# Allegro board CC1310LAUNCHPAD2.brd
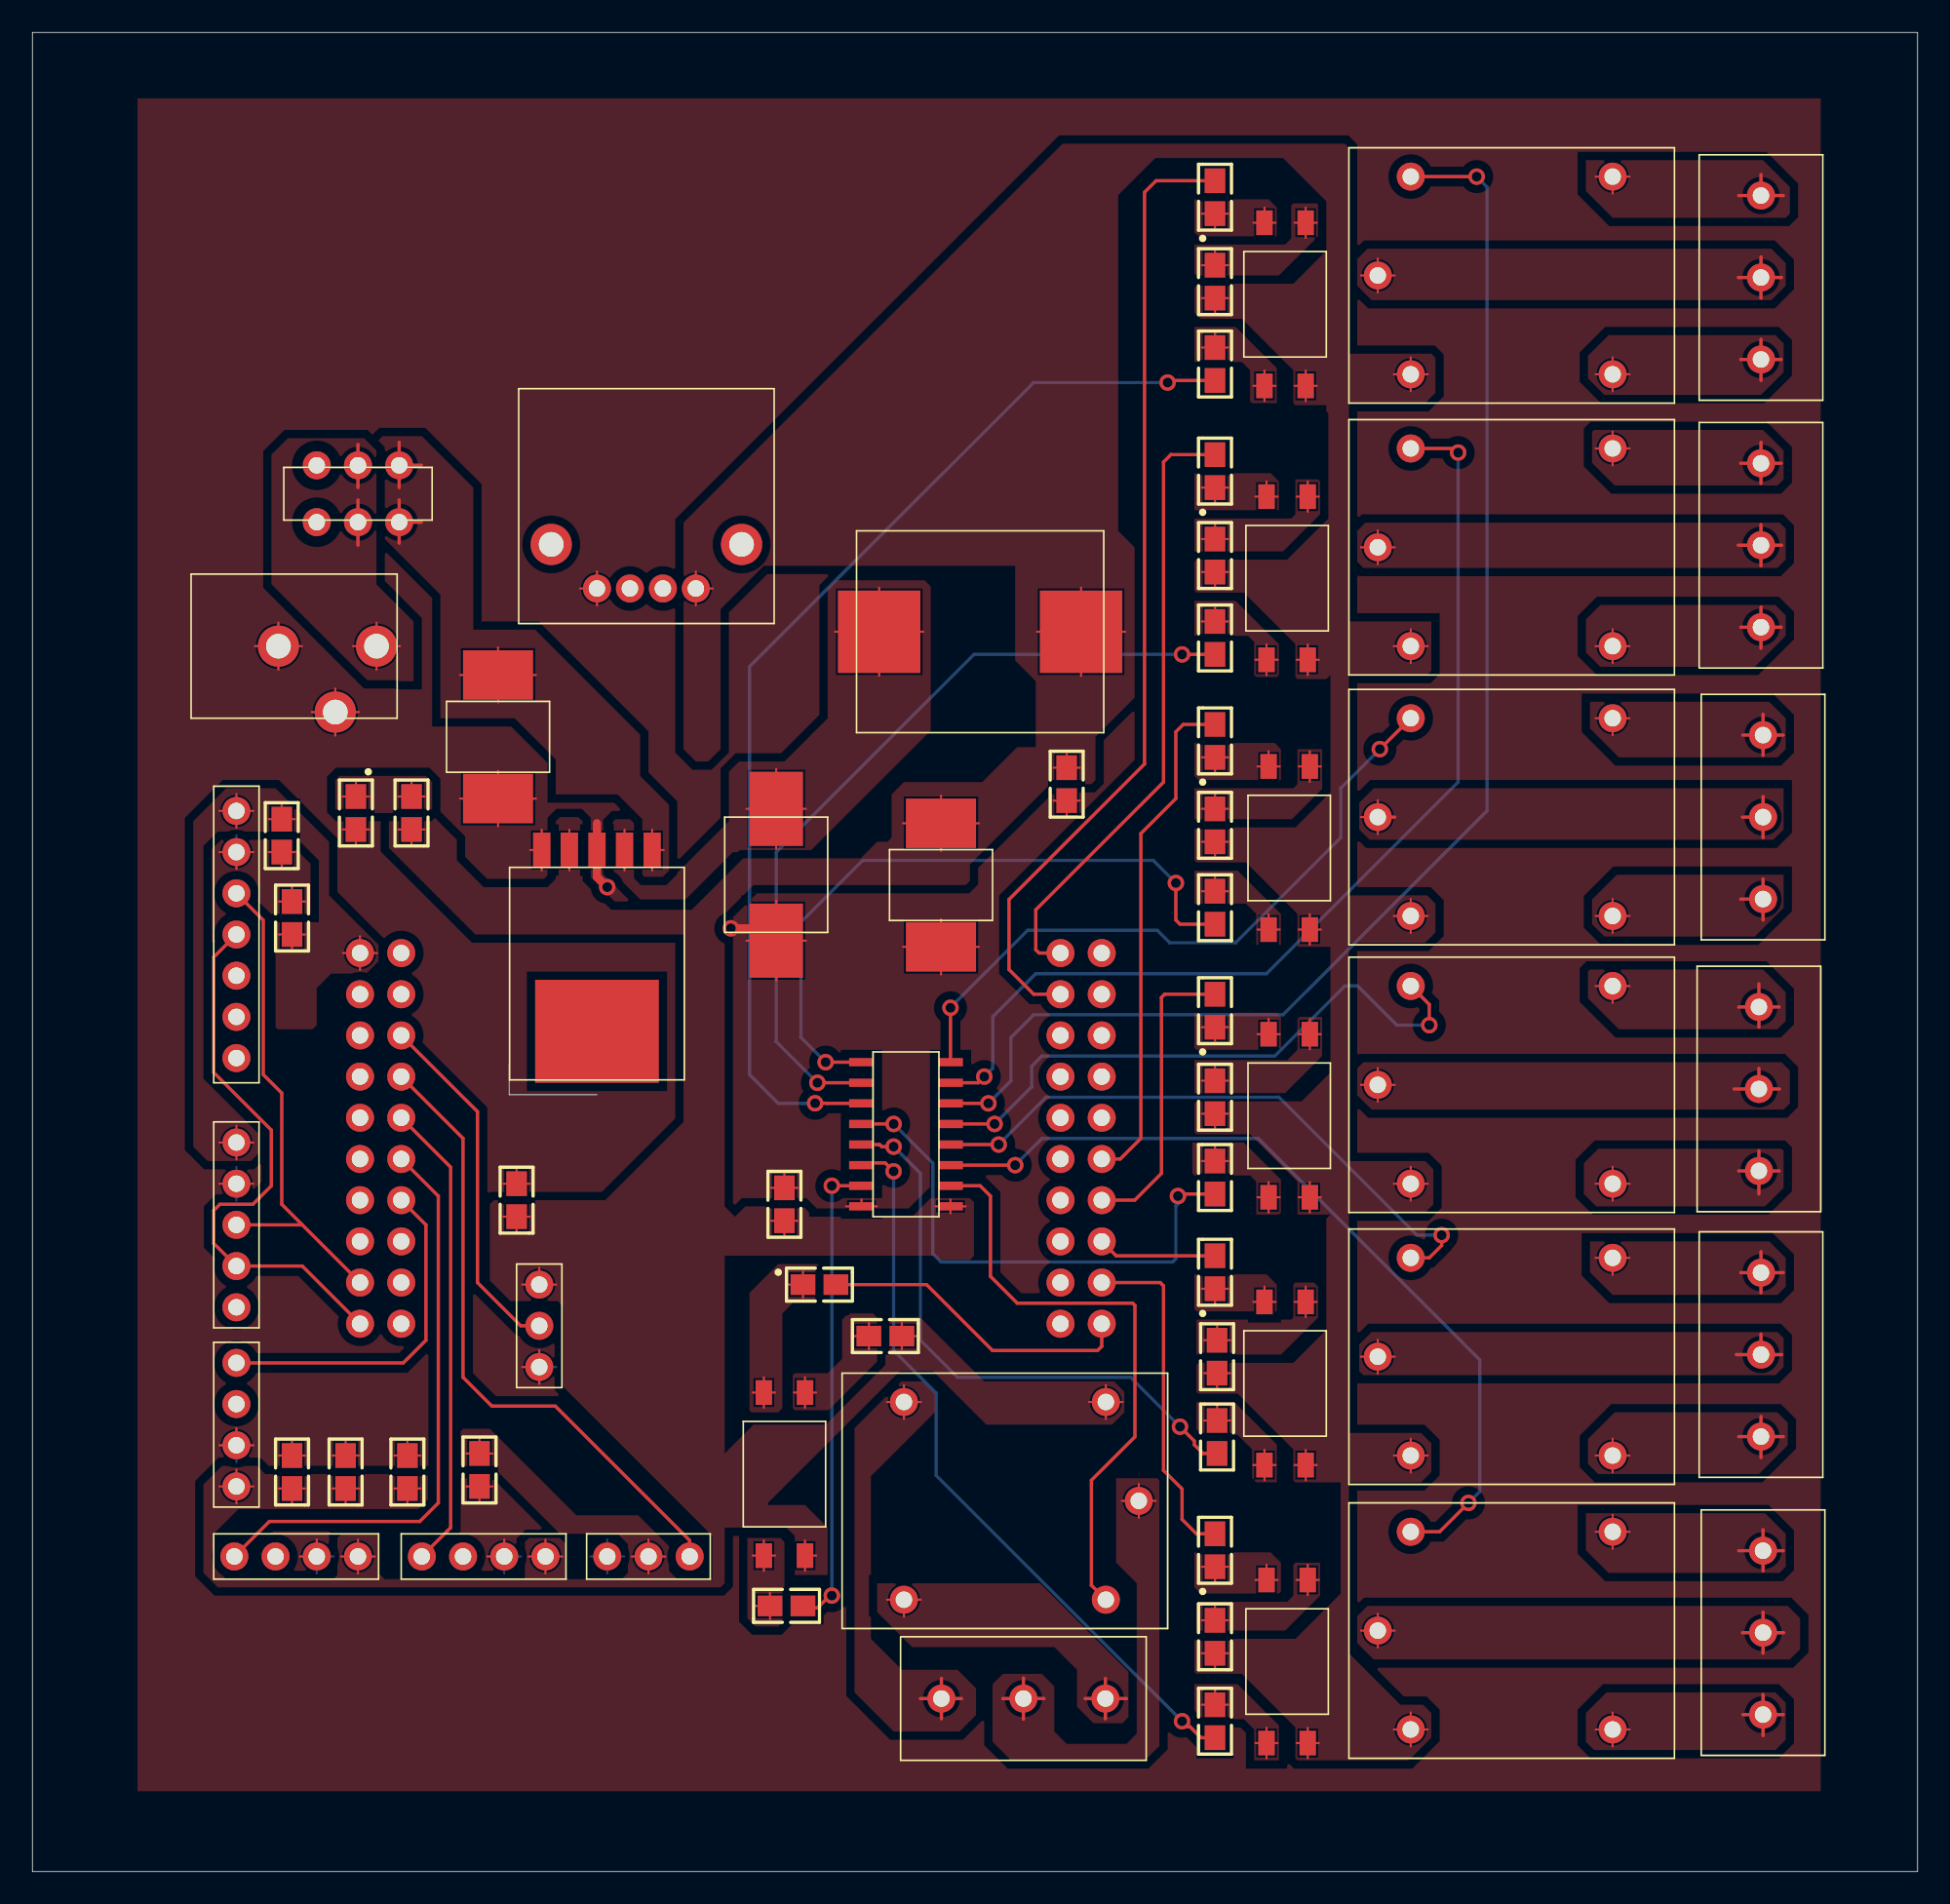
[diagram p0: board, top side]
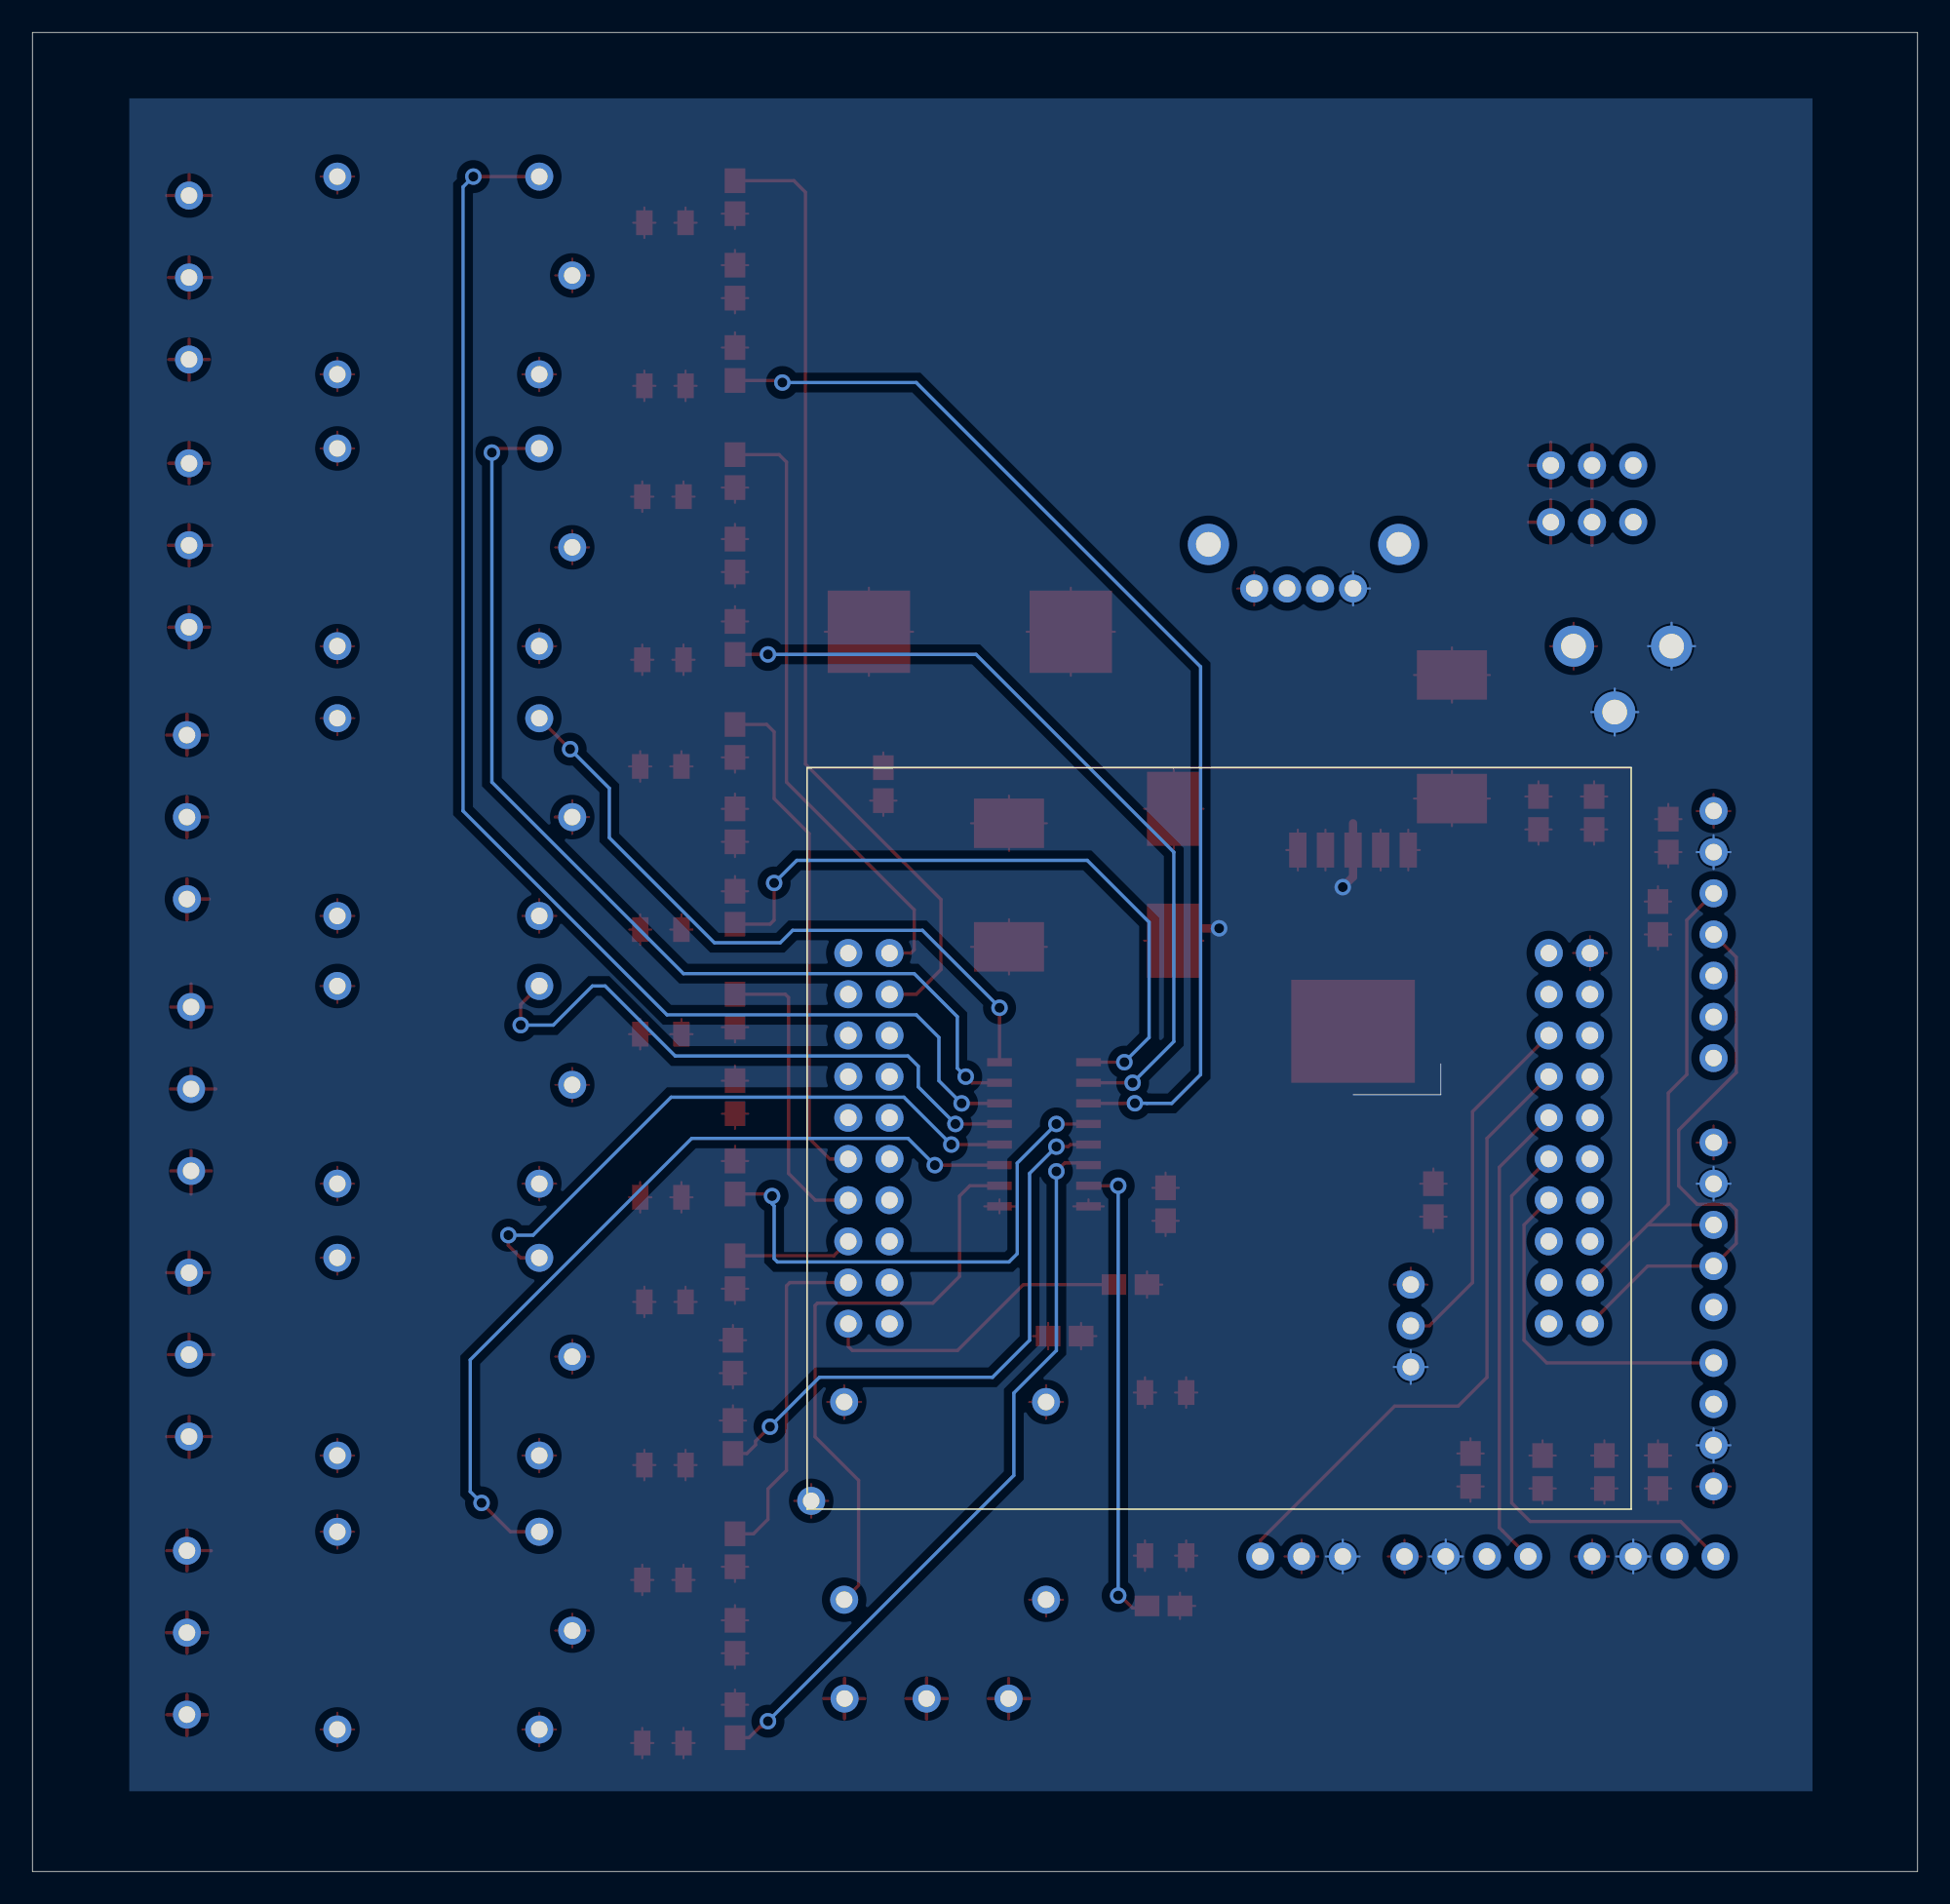
[diagram p1: board, bottom side, seen from below]

Outline 116.21 x 113.41 mm; copper layers: TOP, BOTTOM. Coordinates in mm from the lower left corner of the outline.
Outline path: 0,113.41 0,0 116.21,0 116.21,113.41 0,113.41

## Placement (name value [footprint] x y rotation side)
C1  0.1uF  [C0805]  27.56 24.77 180 top
C2  0.1uF  [C0805]  15.37 63.88 180 top
C3  10uF  [C0805]  63.75 67.06 0 top
C4  0.1uF  [C0805]  16 58.8 180 top
C5  0.1uF  [C0805]  16 24.64 180 top
C6  0.1uF  [C0805]  46.36 41.15 0 top
C8  100uF  [C2312]  28.7 69.98 270 top
C9  100uF  [C2312]  56.01 60.83 270 top
C10  0.1uF  [C0805]  19.3 24.64 180 top
C11  0.1uF  [C0805]  29.85 41.4 180 top
C12  0.1uF  [C0805]  23.11 24.64 180 top
D1  LED  [D0805]  72.9 69.72 0 top
D5  LED  [D0805]  19.94 65.28 180 top
D6  MBR360  [SS34]  45.85 61.47 90 top
D11  LED  [D0805]  72.9 53.09 0 top
D12  LED  [D0805]  72.9 36.96 0 top
D13  LED  [D0805]  72.9 19.81 0 top
D14  LED  [D0805]  48.51 36.2 270 top
D15  LED  [D0805]  72.9 86.36 0 top
D16  LED  [D0805]  72.9 103.25 0 top
J4  HEADER 3  [KF3013P]  106.68 65.02 0 top
J5  HEADER 3  [KF3013P]  106.55 81.79 0 top
J6  HEADER 3  [KF3013P]  106.55 98.3 0 top
J7  HEADER 3  [KF3013P]  106.43 48.26 0 top
J8  HEADER 3  [KF3013P]  106.55 31.88 0 top
J10  HEADER 3  [KF3013P]  61.09 10.67 270 top
J11  HEADER 3  [KF3013P]  106.68 14.73 0 top
L1  47uH  [RH127]  58.42 76.45 0 top
LS1  RELAY SPDT  [HK33F]  91.19 65.02 180 top
LS2  RELAY SPDT  [HK33F]  91.19 81.66 180 top
LS3  RELAY SPDT  [HK33F]  91.19 98.43 180 top
LS4  RELAY SPDT  [HK33F]  91.19 31.75 180 top
LS5  RELAY SPDT  [HK33F]  91.19 48.51 180 top
LS6  RELAY SPDT  [HK33F]  59.94 22.86 0 top
LS7  RELAY SPDT  [HK33F]  91.19 14.86 180 top
R5  220 Ohm  [R0805]  23.37 65.28 180 top
R12  1k Ohm  [R0805]  72.9 64.52 180 top
R13  1k Ohm  [R0805]  72.9 47.75 180 top
R14  1k Ohm  [R0805]  73.03 31.75 180 top
R15  1k Ohm  [R0805]  72.9 14.48 180 top
R16  1k Ohm  [R0805]  52.58 33.02 270 top
R17  1k Ohm  [R0805]  72.9 81.15 180 top
R18  1k Ohm  [R0805]  72.9 98.04 180 top
R20  1k Ohm  [R0805]  72.9 59.44 0 top
R21  1k Ohm  [R0805]  72.9 42.8 0 top
R22  1k Ohm  [R0805]  73.03 26.8 0 top
R23  1k Ohm  [R0805]  72.9 9.27 0 top
R24  1k Ohm  [R0805]  46.48 16.38 90 top
R25  1k Ohm  [R0805]  72.9 76.07 0 top
R26  1k Ohm  [R0805]  72.9 92.96 0 top
U7  -  [ULN2003A]  53.85 45.47 0 top
U9  bh1750  [BH1750]  12.57 39.88 0 top
U10  -  [LM393]  12.57 27.56 180 top
U11  pH  [PH]  37.97 19.43 90 top
U12  CC1310LauchPad  [CC1310CONNECTOR]  43.05 45.21 180 bottom
U13  LM2576HV-ADJ  [LM2576]  34.8 55.37 90 top
U14  -  [LM393]  16.26 19.43 270 top
U15  -  [LM35]  31.24 33.66 0 top
U16  -  [LM393]  27.81 19.43 270 top
U17  DC  [DC002POWER]  16.13 75.56 0 top
U18  USB  [USBFEMALE]  37.85 84.2 90 top
U21  PC817XxNiP0F  [PC817X2NIP0F]  77.47 63.12 270 top
U22  PC817XxNiP0F  [PC817X2NIP0F]  77.47 46.61 270 top
U23  PC817XxNiP0F  [PC817X2NIP0F]  77.22 30.1 270 top
U24  PC817XxNiP0F  [PC817X2NIP0F]  77.34 12.95 270 top
U25  PC817XxNiP0F  [PC817X2NIP0F]  46.36 24.51 270 top
U26  PC817XxNiP0F  [PC817X2NIP0F]  77.34 79.76 270 top
U27  PC817XxNiP0F  [PC817X2NIP0F]  77.22 96.65 270 top
U28  -  [MSS-22D18]  20.07 84.96 90 top
U29  -  [HDC100X]  12.57 57.78 0 top

## Library data of the parts
C1-C6 C10-C12 = CAP NP
C8 C9 = CAP POL
D1 D5 D11-D16 = LED
D6 = DIODE SCHOTTKY
J4-J8 J10 J11 = HEADER 3
L1 = INDUCTOR
LS1-LS7 = RELAY SPDT
R5 R12-R18 R20-R26 = RESISTOR
U7 = ULN2003A
U9 = bh1750
U10 U14 U16 = LM393
U11 = pH
U12 = CC1310LaouchPad
U13 = LM2576HV-ADJ
U15 = LM35
U17 = DC002
U18 = USB
U21-U27 = PC817XxNiP0F
U28 = MSS-22D18
U29 = HDC100X

## Footprints (pads in the part's own frame, mm; a bottom-side part is the same pattern mirrored in y, then rotated)
BH1750
  round 1.727 hole 1.016: 1(0,5.08) 2(0,2.54) 3(0,0) 4(0,-2.54) 5(0,-5.08)
C0805
  rect 1.27x1.524 smd: 1(0,1.016) 2(0,-1.016)
C2312
  rect 3.048x4.318 smd: 1(-3.81,0) 2(3.81,0)
CC1310CONNECTOR
  round 1.727 hole 1.016: 1(22.86,11.43) 2(22.86,8.89) 3(22.86,6.35) 4(22.86,3.81) 5(22.86,1.27) 6(22.86,-1.27) 7(22.86,-3.81) 8(22.86,-6.35) 9(22.86,-8.89) 10(22.86,-11.43) 11(-22.86,-11.43) 12(-22.86,-8.89) 13(-22.86,-6.35) 14(-22.86,-3.81) 15(-22.86,-1.27) 16(-22.86,1.27) 17(-22.86,3.81) 18(-22.86,6.35) 19(-22.86,8.89) 20(-22.86,11.43) 21(20.32,11.43) 22(20.32,8.89) 23(20.32,6.35) 24(20.32,3.81) 25(20.32,1.27) 26(20.32,-1.27) 27(20.32,-3.81) 28(20.32,-6.35) 29(20.32,-8.89) 30(20.32,-11.43) 31(-20.32,-11.43) 32(-20.32,-8.89) 33(-20.32,-6.35) 34(-20.32,-3.81) 35(-20.32,-1.27) 36(-20.32,1.27) 37(-20.32,3.81) 38(-20.32,6.35) 39(-20.32,8.89) 40(-20.32,11.43)
D0805
  rect 1.27x1.524 smd: 1(0,1.016) 2(0,-1.016)
DC002POWER
  round 2.54 hole 1.524: 3(-0.965,0) 4(5.08,0) 5(2.54,-4.064)
HDC100X
  round 1.727 hole 1.016: 1(0,-7.62) 2(0,-5.08) 3(0,-2.54) 4(0,0) 5(0,2.54) 6(0,5.08) 7(0,7.62)
HK33F
  round 1.727 hole 1.016: 1(6.223,6.096) 2(6.223,-6.096) 3(8.255,0) 4(-6.223,6.096) 5(-6.223,-6.096)
KF3013P
  round 1.727 hole 1.016: 1(0,5.055) 2(0,0) 3(0,-5.055)
LM35
  round 1.727 hole 1.016: 1(0,2.54) 2(0,0) 3(0,-2.54)
LM393
  round 1.727 hole 1.016: 1(0,3.81) 2(0,1.27) 3(0,-1.27) 4(0,-3.81)
LM2576
  rect 6.35x7.62 smd: (-3.556,0)
  rect 2.159x1.067 smd: 1(7.62,-3.404) 2(7.62,-1.702) 3(7.62,0) 4(7.62,1.702) 5(7.62,3.404)
MSS-22D18
  round 1.727 hole 1.016: 1(-1.753,2.54) 2(-1.753,0) 3(-1.753,-2.54) 4(1.753,-2.54) 5(1.753,0) 6(1.753,2.54)
PC817X2NIP0F
  rect 1.524x1.016 smd: 1(-5.029,1.27) 2(-5.029,-1.27) 3(5.029,-1.27) 4(5.029,1.27)
PH
  round 1.727 hole 1.016: 1(0,2.54) 2(0,0) 3(0,-2.54)
R0805
  rect 1.27x1.524 smd: 1(0,1.016) 2(0,-1.016)
RH127
  rect 5.08x5.08 smd: 1(-6.223,0) 2(6.223,0)
SS34
  rect 4.572x3.302 smd: 1(-4.064,0) 2(4.064,0)
ULN2003A
  rect 1.524x0.508 smd: 1(-2.743,4.445) 2(-2.743,3.175) 3(-2.743,1.905) 4(-2.743,0.635) 5(-2.743,-0.635) 6(-2.743,-1.905) 7(-2.743,-3.175) 8(-2.743,-4.445) 9(2.743,-4.445) 10(2.743,-3.175) 11(2.743,-1.905) 12(2.743,-0.635) 13(2.743,0.635) 14(2.743,1.905) 15(2.743,3.175) 16(2.743,4.445)
USBFEMALE
  round 2.54 hole 1.524: (-2.362,5.867) (-2.362,-5.867)
  round 1.727 hole 1.016: 1(-5.08,-3.048) 2(-5.08,-1.016) 3(-5.08,1.016) 4(-5.08,3.048)

## Nets
3V3: C2.2 C4.1 U9.1(VCC) U12.1(3V3) U29.7(VIN)
5V: C1.2 C3.1 C5.1 C6.2 C9.1 C10.1 C11.1 C12.1 L1.2 LS1.1(COIL1) LS2.1(COIL1) LS3.1(COIL1) LS4.1(COIL1) LS5.1(COIL1) LS6.1(COIL1) LS7.1(COIL1) R5.1 R12.1 R13.1 R14.1 R15.1 R16.1 R17.1 R18.1 U7.9(COM) U10.1(VCC) U11.2(VCC) U13.4(FEEDBACK) U14.1(VCC) U15.1(VCC) U16.1(VCC) U18.1(VCC) U21.4(EMITTER) U22.4(EMITTER) U23.4(EMITTER) U24.4(EMITTER) U25.4(EMITTER) U26.4(EMITTER) U27.4(EMITTER)
GND: C1.1 C2.1 C3.2 C4.2 C5.2 C6.1 C8.2 C9.2 C10.2 C11.2 C12.2 D5.1(CATHODE) D6.1(ANODE) U7.8(E) U9.2(GND) U10.2(GND) U11.1(GND) U13.3(GND) U13.5(ON/OFF) U14.2(GND) U15.3(GND) U16.2(GND) U17.3(GND1) U17.5(GND2) U18.4(GND) U29.6(GND)
A: U12.21(5V)
N45592: C8.1 U13.1(VIN) U28.3(C1) U28.4(C2)
N45672: D6.2(CATHODE) L1.1 U13.2(OUTPUT)
N45788: U9.3(SCL) U12.9(DIO4 / I2C SCL) U29.5(SCL)
N45822: U9.4(SDA) U12.10(DIO5 / I2C SDA) U29.4(SDA)
N45888: U12.25(DIO27 / A4) U16.4(AO)
N45956: LS2.2(COIL2) U7.15(2C)
N45960: LS3.2(COIL2) U7.14(3C)
N46040: LS7.2(COIL2) U7.11(6C)
N46052: LS6.2(COIL2) U7.10(7C)
N46056: J11.2 LS7.3(COMMON)
N46086: J11.1 LS7.5(NC)
N46098: J11.3 LS7.4(NO)
N46172: LS4.2(COIL2) U7.12(5C)
N46276: LS5.2(COIL2) U7.13(4C)
N47108: U12.23(DIO25 / A2) U15.2(OUT)
N47294: J4.2 LS1.3(COMMON)
N47328: J4.1 LS1.5(NC)
N47344: J4.3 LS1.4(NO)
N47364: J5.2 LS2.3(COMMON)
N47376: J5.1 LS2.5(NC)
N47410: J5.3 LS2.4(NO)
N47434: J6.2 LS3.3(COMMON)
N47472: J6.1 LS3.5(NC)
N47484: J6.3 LS3.4(NO)
N47508: J7.2 LS5.3(COMMON)
N47520: J7.1 LS5.5(NC)
N47550: J7.3 LS5.4(NO)
N47574: J8.2 LS4.3(COMMON)
N47604: J8.1 LS4.5(NC)
N47616: J8.3 LS4.4(NO)
N47728: J10.2 LS6.3(COMMON)
N47740: J10.1 LS6.5(NC)
N47770: J10.3 LS6.4(NO)
N59569: U12.26(DIO28 / A5) U14.4(AO)
N60071: U11.3(AO) U12.24(DIO26 / A3)
N63732: U10.4(AO) U12.27(DIO29 / A6)
N64930: LS1.2(COIL2) U7.16(1C)
N72485: R12.2 U21.1(ANODE)
N72769: R13.2 U22.1(ANODE)
N73065: R14.2 U23.1(ANODE)
N73365: R15.2 U24.1(ANODE)
N73669: R16.2 U25.1(ANODE)
N74807: D1.1(CATHODE) U12.15(DIO9 / MOSI)
N74854: D11.1(CATHODE) U12.14(DIO8 / MISO)
N74907: D12.1(CATHODE) U12.13(DIO13 / BTN1)
N74952: D13.1(CATHODE) U12.12(DIO14 / BTN2)
N74990: D14.2(ANODE) U25.2(CATHODE)
N74994: D14.1(CATHODE) U12.11(DIO15)
N75036: D15.1(CATHODE) U12.40(DIO7 / GRN LED)
N75078: D16.1(CATHODE) U12.39(DIO8 / RED LED)
N76545: R20.1 U21.3(COLLECTOR)
N76560: R21.1 U22.3(COLLECTOR)
N76587: R22.1 U23.3(COLLECTOR)
N76621: R23.1 U24.3(COLLECTOR)
N76655: R24.1 U25.3(COLLECTOR)
N87792: D1.2(ANODE) U21.2(CATHODE)
N88579: D11.2(ANODE) U22.2(CATHODE)
N89000: D12.2(ANODE) U23.2(CATHODE)
N89401: D13.2(ANODE) U24.2(CATHODE)
N90793: R17.2 U26.1(ANODE)
N91085: D15.2(ANODE) U26.2(CATHODE)
N91216: R25.1 U26.3(COLLECTOR)
N91679: R18.2 U27.1(ANODE)
N91683: D16.2(ANODE) U27.2(CATHODE)
N91836: R26.1 U27.3(COLLECTOR)
N91946: R26.2 U7.3(3B)
N91982: R20.2 U7.1(1B)
N92026: R21.2 U7.4(4B)
N92057: R25.2 U7.2(2B)
N93563: R23.2 U7.6(6B)
N93742: R24.2 U7.7(7B)
N95463: U17.4(VCC) U28.2(B1) U28.5(B2)
N101467: R22.2 U7.5(5B)
N478560: D5.2(ANODE) R5.2

Pads without a net: U9 5; U10 3; U12 2 3 4 5 6 7 8 16 17 18 19 20 22 28 29 30 31 32 33 34 35 36 37 38; U14 3; U16 3; U18 2 3; U28 1 6; U29 1 2 3

## Via types
v1: diameter 1.016, hole 0.61, TOP to BOTTOM, 30 vias

## Routing (per net, layer and track width the routed paths; a pad name or vN(x,y) marks a point on that pad's centre or on a via; arc(x,y) is an arc through that point)
3V3: length 17.6
  TOP w0.127: U12.1 21.23,56.64 ; U12.1 20.19,55.6 ; U12.1 20.19,57.68 ; U12.1 19.15,56.64 ; U29.7 13.61,65.41 ; U29.7 12.57,66.45 ; U29.7 12.57,64.36 ; U29.7 11.53,65.41 ; 14.55,64.9 C2.2 ; C2.2 15.37,65.84 ; C2.2 16.18,64.9 ; 11.53,44.96 U9.1 ; U9.1 13.61,44.96 ; U9.1 12.57,43.92 ; U9.1 12.57,46 ; 16,56.84 16,57.78 ; 16,57.78 15.19,57.78 ; 16,57.78 16.82,57.78
5V: length 136.9
  TOP w0.127: 29.85,39.45 C11.1 ; C11.1 30.66,40.39 ; C11.1 29.03,40.39 ; 23.11,22.68 C12.1 ; C12.1 22.3,23.62 ; C12.1 23.93,23.62 ; LS4.1 86,25.65 ; LS4.1 84.96,24.61 ; LS4.1 84.96,26.7 ; LS4.1 83.92,25.65 ; 72.9,62.56 R12.1 ; R12.1 72.08,63.5 ; R12.1 73.71,63.5 ; LS2.1 86,75.56 ; LS2.1 83.92,75.56 ; LS2.1 84.96,74.52 ; LS2.1 84.96,76.61 ; 33.1,64.25 U13.4 33.1,61.73 ; 23.37,63.32 R5.1 ; R5.1 22.55,64.26 ; R5.1 24.18,64.26 ; L1.2 67.36,76.45 ; L1.2 64.64,73.74 ; L1.2 64.64,79.17 ; L1.2 61.92,76.45 ; 12.57,22.71 U10.1 ; U10.1 12.57,24.79 ; U10.1 13.61,23.75 ; U10.1 11.53,23.75 ; R18.1 73.71,97.03 ; R18.1 72.08,97.03 ; R18.1 72.9,96.09 ; 78.61,6.98 U24.4 ; U24.4 78.61,8.87 ; U24.4 79.3,7.92 ; U24.4 77.93,7.92 ; 73.03,29.79 R14.1 ; R14.1 73.84,30.73 ; R14.1 72.21,30.73 ; 18.49,23.62 C10.1 ; C10.1 20.12,23.62 ; C10.1 19.3,22.68 ; C5.1 16.82,23.62 ; C5.1 15.19,23.62 ; C5.1 16,22.68 ; 78.74,57.15 U21.4 ; U21.4 78.05,58.09 ; U21.4 78.74,59.03 ; U21.4 79.43,58.09 ; 46.36,39.19 C6.2 ; C6.2 47.17,40.13 ; C6.2 45.54,40.13 ; 84.96,7.72 LS7.1 ; LS7.1 86,8.76 ; LS7.1 84.96,9.8 ; LS7.1 83.92,8.76 ; 72.08,13.46 R15.1 ; R15.1 73.71,13.46 ; R15.1 72.9,12.52 ; 84.96,57.89 LS1.1 ; LS1.1 84.96,59.97 ; LS1.1 83.92,58.93 ; LS1.1 86,58.93 ; 72.08,46.74 R13.1 ; R13.1 72.9,45.8 ; R13.1 73.71,46.74 ; 30.58,19.43 U16.1 ; U16.1 32.66,19.43 ; U16.1 31.62,20.47 ; U16.1 31.62,18.39 ; 26.75,25.78 C1.2 ; C1.2 27.56,26.72 ; C1.2 28.37,25.78 ; 66.17,27.91 LS6.1 ; LS6.1 65.13,28.96 ; LS6.1 66.17,30 ; LS6.1 67.21,28.96 ; 77.8,91.62 U27.4 ; U27.4 79.17,91.62 ; U27.4 78.49,90.68 ; U27.4 78.49,92.56 ; U11.2 39.01,19.43 ; U11.2 37.97,18.39 ; U11.2 37.97,20.47 ; U11.2 36.93,19.43 ; 84.96,41.38 LS5.1 ; LS5.1 86,42.42 ; LS5.1 84.96,43.46 ; LS5.1 83.92,42.42 ; 72.08,80.14 72.9,80.14 ; 72.9,80.14 73.71,80.14 ; 72.9,80.14 72.9,79.2 ; 55.65,41.02 U7.9 ; U7.9 57.53,41.02 ; U7.9 56.59,41.45 ; U7.9 56.59,40.59 ; U22.4 78.74,42.52 ; U22.4 79.43,41.58 ; U22.4 78.05,41.58 ; U22.4 78.74,40.64 ; U18.1 40.89,80.16 ; U18.1 40.89,78.08 ; U18.1 41.94,79.12 ; 19.02,19.43 U14.1 ; U14.1 20.07,20.47 ; U14.1 21.11,19.43 ; U14.1 20.07,18.39 ; 62.94,68.07 C3.1 ; C3.1 64.57,68.07 ; C3.1 63.75,69.01 ; 53.59,33.02 53.59,33.83 ; 53.59,33.02 53.59,32.21 ; 53.59,33.02 54.53,33.02 ; U25.4 47.62,20.42 ; U25.4 47.62,18.54 ; U25.4 48.31,19.48 ; U26.4 78.61,75.67 ; U26.4 79.3,74.73 ; U26.4 77.93,74.73 ; U26.4 78.61,73.79 ; 30.2,36.2 31.24,36.2 ; 31.24,36.2 31.24,37.24 ; 31.24,36.2 32.28,36.2 ; 83.92,92.33 LS3.1 ; LS3.1 84.96,91.29 ; LS3.1 86,92.33 ; LS3.1 84.96,93.37 ; C9.1 56.01,66.35 ; C9.1 53.67,64.64 ; C9.1 56.01,62.94 ; C9.1 58.34,64.64 ; U23.4 78.49,26.01 ; U23.4 77.8,25.07 ; U23.4 78.49,24.13 ; U23.4 79.17,25.07
GND: length 137.5
  TOP w0.127: 26.36,66.17 C8.2 ; C8.2 28.7,67.87 ; C8.2 31.04,66.17 ; C8.2 28.7,64.46 ; U15.3 31.24,32.16 ; U15.3 31.24,30.07 ; U15.3 30.2,31.12 ; D6.1 47.68,57.4 ; D6.1 45.85,54.94 ; D6.1 44.02,57.4 ; D6.1 45.85,59.87 ; 28.04,19.43 U16.2 29.08,20.47 ; D5.1 20.75,64.26 ; D5.1 19.13,64.26 ; D5.1 19.94,63.32 ; C4.2 16,60.76 ; C4.2 16.82,59.82 ; C4.2 15.19,59.82 ; U29.6 13.61,62.87 ; U29.6 12.57,61.82 ; U29.6 11.53,62.87 ; 13.72,75.56 U17.3 ; U17.3 15.16,77.01 ; U17.3 16.61,75.56 ; U17.3 15.16,74.12 ; 15.37,61.92 C2.1 ; C2.1 14.55,62.87 ; C2.1 16.18,62.87 ; C10.2 19.3,26.59 ; C10.2 20.12,25.65 ; C10.2 18.49,25.65 ; 56.01,55.32 C9.2 ; C9.2 53.67,57.02 ; C9.2 58.34,57.02 ; C9.2 56.01,58.73 ; C12.2 23.11,26.59 ; C12.2 22.3,25.65 ; C12.2 23.93,25.65 ; 34.8,78.08 U18.4 ; U18.4 34.8,80.16 ; U18.4 33.76,79.12 ; C1.1 28.37,23.75 ; C1.1 27.56,22.81 ; C1.1 26.75,23.75 ; U10.2 12.57,27.33 ; U10.2 13.61,26.29 ; U10.2 11.53,26.29 ; 15.19,25.65 C5.2 ; C5.2 16.82,25.65 ; C5.2 16,26.59 ; 17.22,71.5 U17.5 ; U17.5 18.67,72.95 ; U17.5 18.67,70.05 ; U17.5 20.12,71.5 ; U7.8 51.1,41.45 ; U7.8 50.16,41.02 ; U7.8 52.05,41.02 ; 31.39,61.73 U13.5 ; U13.5 30.68,62.99 ; U13.5 31.39,64.25 ; 62.94,66.04 C3.2 ; C3.2 63.75,65.1 ; C3.2 64.57,66.04 ; 13.61,42.42 U9.2 11.53,42.42 ; 17.53,20.47 U14.2 16.48,19.43 ; C6.1 46.36,43.1 ; C6.1 45.54,42.16 ; C6.1 47.17,42.16 ; C11.2 29.85,43.36 ; C11.2 29.03,42.42 ; C11.2 30.66,42.42
  TOP w0.508: D6.1 45.09,58.17 v1(43.05,58.17) ; v1(35.43,60.71) 34.8,61.34 U13.3 34.8,64.64
  BOTTOM w0.127: U16.2 29.08,20.47 ; U16.2 30.12,19.43 ; U16.2 28.04,19.43 ; U16.2 29.08,18.39 ; 12.57,41.38 U9.2 ; U9.2 12.57,43.46 ; U9.2 13.61,42.42 ; U9.2 11.53,42.42 ; U17.3 15.16,77.01 ; U17.3 13.72,75.56 ; U17.3 16.61,75.56 ; U17.3 15.16,74.12 ; U29.6 12.57,63.91 ; U29.6 13.61,62.87 ; U29.6 12.57,61.82 ; U29.6 11.53,62.87 ; 17.22,71.5 U17.5 ; U17.5 20.12,71.5 ; U17.5 18.67,70.05 ; U17.5 18.67,72.95 ; U14.2 17.53,20.47 ; U14.2 17.53,18.39 ; U14.2 16.48,19.43 ; U14.2 18.57,19.43 ; 34.39,19.43 U11.1 ; U11.1 35.43,20.47 ; U11.1 35.43,18.39 ; U11.1 36.47,19.43 ; U10.2 13.61,26.29 ; U10.2 11.53,26.29 ; U10.2 12.57,25.25 ; U10.2 12.57,27.33 ; 30.2,31.12 U15.3 ; U15.3 31.24,30.07 ; U15.3 31.24,32.16 ; U15.3 32.28,31.12 ; 34.8,78.08 U18.4 ; U18.4 33.76,79.12 ; U18.4 34.8,80.16
N45592: length 19.5
  TOP w0.127: U13.1 38.2,64.25 ; U13.1 38.91,62.99 ; U13.1 38.2,61.73 ; C8.1 31.04,73.79 ; C8.1 28.7,75.49 ; C8.1 26.36,73.79 ; C8.1 28.7,72.08
  TOP w0.203: 22.61,86.72 22.61,88.14 ; 22.61,86.72 23.98,86.72 ; 22.61,86.72 22.61,85.34 ; 22.61,83.21 22.61,84.58 ; 22.61,83.21 23.98,83.21 ; 22.61,83.21 22.61,81.92
N45672: length 22
  TOP w0.127: L1.1 54.92,76.45 ; L1.1 49.48,76.45 ; L1.1 52.2,73.74 ; L1.1 52.2,79.17 ; D6.2 45.85,68 ; D6.2 45.85,63.07 ; D6.2 44.02,65.53 ; D6.2 47.68,65.53 ; 36.5,61.73 U13.2 36.5,64.25
N45788: length 31.2
  TOP w0.203: U29.5 14.22,58.67 14.22,49.15 15.37,48.01 15.37,41.15 16.64,39.88 ; 16.64,39.88 U12.9 ; 16.64,39.88 U9.3
N45822: length 34.8
  TOP w0.203: U12.10 16.64,37.34 U9.4 11.18,38.74 11.18,40.77 11.56,41.15 13.59,41.15 14.72,42.28 14.72,45.73 11.18,49.27 11.18,56.39 U29.4
N45888: length 29.1
  TOP w0.203: U12.25 25.78,43.43 25.78,21.21 25.58,21.01 U16.4
N45956: length 64.2
  TOP w0.203: U7.15 58.29,48.64 v1(58.67,49.02) ; LS2.2 87.68,87.76 87.88,87.55 v1(87.88,87.5)
  BOTTOM w0.203: v1(87.88,87.5) 87.88,67.18 76.07,55.37 61.85,55.37 59.19,52.72 59.19,49.54 v1(58.67,49.02)
N45960: length 85.5
  TOP w0.203: LS3.2 v1(89.03,104.52) ; U7.14 v1(58.93,47.37)
  BOTTOM w0.203: v1(58.93,47.37) 60.33,48.77 60.33,51.44 61.72,52.83 77.09,52.83 89.66,65.41 89.66,103.89 v1(89.03,104.52)
N46040: length 52.4
  TOP w0.203: U7.11 v1(60.58,43.56) ; LS7.2 86.74,20.96 v1(88.52,22.73)
  BOTTOM w0.203: v1(60.58,43.56) 62.23,45.21 75.56,45.21 89.22,31.56 89.22,23.43 v1(88.52,22.73)
N46052: length 37
  TOP w0.203: U7.10 58.42,42.29 59.06,41.66 59.06,36.7 60.71,35.05 67.82,35.05 67.96,34.91 67.96,26.81 65.28,24.13 65.28,17.65 LS6.2
N46056: length 9.2
  TOP w0.127: 82.93,13.82 LS7.3 ; LS7.3 81.89,14.86 ; LS7.3 82.93,15.9 ; LS7.3 83.97,14.86
  TOP w0.203: J11.2 107.95,14.73 ; J11.2 106.68,16 ; J11.2 105.41,14.73 ; J11.2 106.68,13.46
N46086: length 9.5
  TOP w0.127: LS7.5 98.45,20.96 ; LS7.5 97.41,19.91 ; LS7.5 97.41,22 ; LS7.5 96.37,20.96
  TOP w0.203: J11.1 106.68,18.54 ; J11.1 106.68,21.08 ; J11.1 107.92,19.79 ; J11.1 105.18,19.79
N46098: length 9.2
  TOP w0.127: LS7.4 98.45,8.76 ; LS7.4 96.37,8.76 ; LS7.4 97.41,7.72 ; LS7.4 97.41,9.8
  TOP w0.203: J11.3 106.68,10.92 ; J11.3 107.92,9.68 ; J11.3 106.68,8.38 ; J11.3 105.44,9.68
N46172: length 37.9
  TOP w0.203: v1(86.87,39.24) 86.87,38.61 86.11,37.85 v1(84.96,37.85) ; U7.12 v1(59.56,44.83)
  BOTTOM w0.203: v1(59.56,44.83) 62.48,47.75 76.84,47.75 85.34,39.24 v1(86.87,39.24)
N46276: length 37.7
  TOP w0.203: v1(86.11,52.2) 86.11,53.47 LS5.2 ; U7.13 v1(59.31,46.1)
  BOTTOM w0.203: v1(59.31,46.1) 61.6,48.39 61.6,49.66 62.23,50.29 76.58,50.29 80.9,54.61 81.69,54.61 84.1,52.2 v1(86.11,52.2)
N47108: length 22.1
  TOP w0.203: U12.23 27.43,46.86 27.43,36.32 30.1,33.66 U15.2
N47294: length 8
  TOP w0.127: 82.93,63.98 LS1.3 ; LS1.3 81.89,65.02 ; LS1.3 82.93,66.07
  TOP w0.203: 83.97,65.02 LS1.3 ; J4.2 106.68,66.29 ; J4.2 106.68,63.75 ; J4.2 105.41,65.02
N47328: length 8.2
  TOP w0.127: LS1.5 98.45,71.12 ; LS1.5 96.37,71.12 ; LS1.5 97.41,70.08
  TOP w0.203: J4.1 106.68,68.83 ; J4.1 105.44,70.08 ; J4.1 106.68,71.37 ; J4.1 107.92,70.08
N47344: length 8.1
  TOP w0.127: LS1.4 98.45,58.93 ; LS1.4 97.41,59.97 ; LS1.4 97.41,57.89 ; LS1.4 96.37,58.93
  TOP w0.203: J4.3 106.68,58.67 ; J4.3 106.68,61.21 ; J4.3 105.31,59.97
N47364: length 9.4
  TOP w0.127: LS2.3 83.97,81.66 ; LS2.3 82.93,80.62 ; LS2.3 82.93,82.7 ; LS2.3 81.89,81.66
  TOP w0.203: J5.2 106.55,83.06 ; J5.2 106.55,80.52 ; J5.2 105.16,81.79 ; J5.2 107.82,81.79
N47376: length 9.2
  TOP w0.127: LS2.5 98.45,87.76 ; LS2.5 96.37,87.76 ; LS2.5 97.41,88.8 ; LS2.5 97.41,86.72
  TOP w0.203: J5.1 106.55,85.6 ; J5.1 106.55,88.14 ; J5.1 107.8,86.84 ; J5.1 105.31,86.84
N47410: length 9.2
  TOP w0.127: LS2.4 97.41,76.61 ; LS2.4 98.45,75.56 ; LS2.4 96.37,75.56 ; LS2.4 97.41,74.52
  TOP w0.203: J5.3 106.55,75.44 ; J5.3 105.31,76.73 ; J5.3 106.55,77.98 ; J5.3 107.8,76.73
N47434: length 9.4
  TOP w0.127: LS3.3 82.93,99.47 ; LS3.3 82.93,97.38 ; LS3.3 83.97,98.43 ; LS3.3 81.89,98.43
  TOP w0.203: J6.2 107.82,98.3 ; J6.2 106.55,97.03 ; J6.2 106.55,99.57 ; J6.2 105.16,98.3
N47472: length 7.2
  TOP w0.127: LS3.5 98.45,104.52 ; LS3.5 96.37,104.52 ; LS3.5 97.41,103.48
  TOP w0.203: J6.1 106.55,104.65 ; J6.1 105.18,103.35 ; J6.1 107.92,103.35
N47484: length 9.2
  TOP w0.127: 97.41,91.29 LS3.4 ; LS3.4 98.45,92.33 ; LS3.4 97.41,93.37 ; LS3.4 96.37,92.33
  TOP w0.203: J6.3 106.55,91.95 ; J6.3 107.8,93.24 ; J6.3 105.31,93.24 ; J6.3 106.55,94.49
N47508: length 8.2
  TOP w0.127: LS5.3 83.97,48.51 ; LS5.3 82.93,49.56 ; LS5.3 81.89,48.51 ; LS5.3 82.93,47.47
  TOP w0.203: J7.2 107.7,48.26 ; J7.2 104.9,48.26 ; J7.2 106.43,49.53
N47520: length 8.3
  TOP w0.127: 96.37,54.61 LS5.5 ; LS5.5 98.45,54.61 ; LS5.5 97.41,53.57
  TOP w0.203: J7.1 107.67,53.31 ; J7.1 106.43,54.74 ; J7.1 106.43,52.07 ; J7.1 105.18,53.31
N47550: length 9.3
  TOP w0.127: LS5.4 97.41,43.46 ; LS5.4 98.45,42.42 ; LS5.4 96.37,42.42 ; LS5.4 97.41,41.38
  TOP w0.203: J7.3 105.18,43.21 ; J7.3 106.43,44.45 ; J7.3 106.43,41.78 ; J7.3 107.67,43.21
N47574: length 8.2
  TOP w0.127: LS4.3 82.93,32.79 ; LS4.3 82.93,30.71 ; LS4.3 81.89,31.75 ; LS4.3 83.97,31.75
  TOP w0.203: J8.2 106.55,33.15 ; J8.2 105.03,31.88 ; J8.2 107.82,31.88
N47604: length 8.3
  TOP w0.127: 97.41,36.8 LS4.5 ; LS4.5 98.45,37.85 ; LS4.5 96.37,37.85
  TOP w0.203: J8.1 106.55,35.69 ; J8.1 106.55,38.23 ; J8.1 107.92,36.93 ; J8.1 105.31,36.93
N47616: length 9.5
  TOP w0.127: LS4.4 98.45,25.65 ; LS4.4 96.37,25.65 ; LS4.4 97.41,26.7 ; LS4.4 97.41,24.61
  TOP w0.203: J8.3 107.92,26.82 ; J8.3 106.55,25.53 ; J8.3 106.55,28.07 ; J8.3 105.18,26.82
N47728: length 9.2
  TOP w0.127: 67.16,22.86 LS6.3 ; LS6.3 68.2,21.82 ; LS6.3 69.24,22.86 ; LS6.3 68.2,23.9
  TOP w0.203: J10.2 62.36,10.67 ; J10.2 61.09,9.4 ; J10.2 59.82,10.67 ; J10.2 61.09,11.94
N47740: length 8.2
  TOP w0.127: LS6.5 54.76,16.76 ; LS6.5 52.68,16.76 ; LS6.5 53.72,15.72
  TOP w0.203: J10.1 66.14,11.91 ; J10.1 67.44,10.67 ; J10.1 64.9,10.67 ; J10.1 66.14,9.42
N47770: length 9.2
  TOP w0.127: LS6.4 54.76,28.96 ; LS6.4 53.72,27.91 ; LS6.4 52.68,28.96 ; LS6.4 53.72,30
  TOP w0.203: J10.3 57.28,10.67 ; J10.3 56.03,9.42 ; J10.3 56.03,11.91 ; J10.3 54.74,10.67
N59569: length 36.1
  TOP w0.203: U14.4 14.61,21.59 23.88,21.59 25.02,22.73 25.02,41.66 U12.26
N60071: length 39.2
  TOP w0.203: U12.24 26.54,45.21 26.54,30.48 28.32,28.7 32.23,28.7 40.51,20.42 U11.3
N63732: length 21.5
  TOP w0.203: U10.4 22.86,31.37 24.26,32.77 24.26,39.88 U12.27
N64930: length 41.6
  TOP w0.203: U7.16 v1(56.59,53.26) ; LS1.2 v1(83.06,69.22)
  BOTTOM w0.203: v1(56.59,53.26) 56.59,53.29 61.34,58.04 69.34,58.04 70.1,57.28 74.17,57.28 80.65,63.75 80.65,66.8 v1(83.06,69.22)
N72485: length 5.8
  TOP w0.127: 78.74,67.21 U21.1 ; U21.1 78.05,68.15 ; U21.1 78.74,69.09 ; U21.1 79.43,68.15 ; R12.2 72.9,66.47 ; R12.2 72.08,65.53 ; R12.2 73.71,65.53
N72769: length 5.8
  TOP w0.127: R13.2 72.9,49.71 ; R13.2 73.71,48.77 ; R13.2 72.08,48.77 ; 78.74,50.7 U22.1 ; U22.1 79.43,51.64 ; U22.1 78.74,52.58 ; U22.1 78.05,51.64
N73065: length 5.8
  TOP w0.127: U23.1 78.49,36.07 ; U23.1 77.8,35.13 ; U23.1 79.17,35.13 ; U23.1 78.49,34.19 ; R14.2 73.03,33.71 ; R14.2 72.21,32.77 ; R14.2 73.84,32.77
N73365: length 5.8
  TOP w0.127: 72.08,15.49 R15.2 ; R15.2 72.9,16.43 ; R15.2 73.71,15.49 ; 77.93,17.98 U24.1 ; U24.1 79.3,17.98 ; U24.1 78.61,18.92 ; U24.1 78.61,17.04
N73669: length 5.8
  TOP w0.127: U25.1 47.62,30.48 ; U25.1 46.94,29.54 ; U25.1 48.31,29.54 ; U25.1 47.62,28.6 ; 50.62,33.02 R16.2 ; R16.2 51.56,32.21 ; R16.2 51.56,33.83
N74807: length 31.5
  TOP w0.203: U12.15 67.06,43.94 68.33,45.21 68.33,64.01 70.49,66.17 70.49,70.28 70.94,70.74 D1.1
N74854: length 18.6
  TOP w0.203: U12.14 67.94,41.4 69.6,43.05 69.6,53.9 69.8,54.1 D11.1
N74907: length 7.4
  TOP w0.203: U12.13 66.8,37.97 D12.1
N74952: length 21.2
  TOP w0.203: U12.12 69.52,36.32 69.72,36.12 69.72,24.74 70.87,23.6 70.87,21.72 71.75,20.83 D13.1
N74990: length 5.8
  TOP w0.127: 47.5,35.38 D14.2 ; D14.2 47.5,37.01 ; D14.2 46.56,36.2 ; U25.2 45.09,30.48 ; U25.2 44.4,29.54 ; U25.2 45.77,29.54 ; U25.2 45.09,28.6
N74994: length 19.6
  TOP w0.203: v1(65.91,33.78) 65.91,32.39 65.66,32.13 59.18,32.13 55.12,36.2 D14.1
N75036: length 38.3
  TOP w0.203: U12.40 62.05,56.64 61.85,56.85 61.85,59.31 69.72,67.18 69.72,86.92 70.18,87.38 D15.1
N75078: length 59.8
  TOP w0.203: D16.1 69.27,104.27 68.55,103.56 68.55,68.3 60.2,59.94 60.2,55.63 61.72,54.1 U12.39
N76545: length 4.9
  TOP w0.127: 75.51,58.09 U21.3 ; U21.3 76.89,58.09 ; U21.3 76.2,59.03 ; R20.1 72.9,61.39 ; R20.1 73.71,60.45 ; R20.1 72.08,60.45
N76560: length 5.8
  TOP w0.127: U22.3 76.2,42.52 ; U22.3 76.89,41.58 ; U22.3 75.51,41.58 ; U22.3 76.2,40.64 ; R21.1 73.71,43.81 ; R21.1 72.9,44.76 ; R21.1 72.08,43.81
N76587: length 5.8
  TOP w0.127: 75.26,25.07 U23.3 ; U23.3 75.95,24.13 ; U23.3 75.95,26.01 ; U23.3 76.63,25.07 ; R22.1 73.03,28.75 ; R22.1 72.21,27.81 ; R22.1 73.84,27.81
N76621: length 5.8
  TOP w0.127: U24.3 76.07,8.87 ; U24.3 76.76,7.92 ; U24.3 76.07,6.98 ; U24.3 75.39,7.92 ; R23.1 73.71,10.29 ; R23.1 72.08,10.29 ; R23.1 72.9,11.23
N76655: length 5.8
  TOP w0.127: U25.3 45.09,20.42 ; U25.3 45.09,18.54 ; U25.3 45.77,19.48 ; U25.3 44.4,19.48 ; 45.47,15.57 R24.1 ; R24.1 45.47,17.2 ; R24.1 44.53,16.38
N87792: length 4.9
  TOP w0.127: 72.08,68.71 D1.2 ; D1.2 72.9,67.77 ; D1.2 73.71,68.71 ; 75.51,68.15 U21.2 ; U21.2 76.89,68.15 ; U21.2 76.2,69.09
N88579: length 4.9
  TOP w0.127: 75.51,51.64 U22.2 ; U22.2 76.89,51.64 ; U22.2 76.2,52.58 ; D11.2 73.71,52.07 ; D11.2 72.08,52.07 ; D11.2 72.9,51.13
N89000: length 4.9
  TOP w0.127: 72.08,35.94 72.9,35.94 ; 72.9,35.94 73.71,35.94 ; 72.9,35.94 72.9,35 ; 75.26,35.13 U23.2 ; U23.2 75.95,36.07 ; U23.2 76.63,35.13
N89401: length 4.9
  TOP w0.127: 75.39,17.98 U24.2 ; U24.2 76.07,18.92 ; U24.2 76.76,17.98 ; 72.08,18.8 D13.2 ; D13.2 73.71,18.8 ; D13.2 72.9,17.86
N90793: length 5.8
  TOP w0.127: R17.2 73.71,82.17 ; R17.2 72.9,83.11 ; R17.2 72.08,82.17 ; 77.93,84.79 U26.1 ; U26.1 79.3,84.79 ; U26.1 78.61,85.73 ; U26.1 78.61,83.84
N91085: length 4.9
  TOP w0.127: 72.9,84.4 D15.2 ; D15.2 72.08,85.34 ; D15.2 73.71,85.34 ; 75.39,84.79 U26.2 ; U26.2 76.76,84.79 ; U26.2 76.07,85.73
N91216: length 5.8
  TOP w0.127: R25.1 72.9,78.03 ; R25.1 72.08,77.09 ; R25.1 73.71,77.09 ; 75.39,74.73 U26.3 ; U26.3 76.76,74.73 ; U26.3 76.07,73.79 ; U26.3 76.07,75.67
N91679: length 5.8
  TOP w0.127: U27.1 79.17,101.68 ; U27.1 78.49,100.74 ; U27.1 77.8,101.68 ; U27.1 78.49,102.62 ; R18.2 72.9,100 ; R18.2 72.08,99.06 ; R18.2 73.71,99.06
N91683: length 4.9
  TOP w0.127: U27.2 76.63,101.68 ; U27.2 75.95,102.62 ; U27.2 75.26,101.68 ; 72.08,102.24 D16.2 ; D16.2 73.71,102.24 ; D16.2 72.9,101.29
N91836: length 5.8
  TOP w0.127: R26.1 73.71,93.98 ; R26.1 72.08,93.98 ; R26.1 72.9,94.92 ; 75.26,91.62 U27.3 ; U27.3 75.95,90.68 ; U27.3 76.63,91.62 ; U27.3 75.95,92.56
N91946: length 68.8
  TOP w0.203: U7.3 48.99,47.37 48.98,47.38 v1(48.25,47.38) ; v1(69.98,91.82) 70.1,91.95 R26.2
  BOTTOM w0.203: v1(48.25,47.38) 47.51,47.38 47.5,47.37 45.97,47.37 44.2,49.15 44.2,74.3 61.72,91.82 v1(69.98,91.82)
N91982: length 41.6
  TOP w0.203: R20.2 70.74,58.42 70.49,58.67 v1(70.49,60.96) ; U7.1 v1(48.9,49.91)
  BOTTOM w0.203: v1(70.49,60.96) 69.09,62.36 51.18,62.36 47.37,58.55 47.37,51.44 v1(48.9,49.91)
N92026: length 32.5
  TOP w0.203: v1(70.61,41.66) 70.74,41.78 R21.2 ; U7.4 v1(53.09,46.1)
  BOTTOM w0.203: v1(53.09,46.1) 55.5,43.69 55.5,38.1 56.01,37.59 70.28,37.59 70.49,37.8 70.49,41.05 70.61,41.17 v1(70.61,41.66)
N92057: length 50.1
  TOP w0.203: R25.2 v1(70.87,75.06) ; U7.2 v1(48.39,48.64)
  BOTTOM w0.203: v1(70.87,75.06) 58.04,75.06 45.85,62.87 45.85,51.18 v1(48.39,48.64)
N93563: length 46
  TOP w0.203: U7.6 51.24,43.7 52.57,43.7 v1(53.09,43.18) ; R23.2 72.03,8.25 71.36,8.93 71.21,8.93 v1(70.87,9.27)
  BOTTOM w0.203: v1(53.09,43.18) 53.09,32.13 55.71,29.51 55.71,24.43 v1(70.87,9.27)
N93742: length 29.2
  TOP w0.203: 47.5,16.26 48.39,16.26 49.15,17.02 v1(49.28,17.02) ; U7.7 v1(49.28,42.29)
  BOTTOM w0.203: v1(49.28,17.02) v1(49.28,42.29)
N95463: length 11.3
  TOP w0.127: U17.4 22.66,75.56 ; U17.4 21.21,77.01 ; U17.4 19.76,75.56 ; U17.4 21.21,74.12
  TOP w0.203: 20.07,84.58 U28.2 20.07,81.79 ; 20.07,85.34 U28.5 20.07,88.01
N101467: length 36
  TOP w0.203: v1(53.09,44.7) 52.35,44.7 52.22,44.83 U7.5 ; v1(70.74,27.43) 71.63,26.54 71.63,26.31 72.16,25.78 R22.2
  BOTTOM w0.203: v1(70.74,27.43) 67.69,30.48 57.02,30.48 54.74,32.77 54.74,43.05 v1(53.09,44.7)
N478560: length 5.1
  TOP w0.127: R5.2 23.37,67.23 ; R5.2 22.55,66.29 ; R5.2 24.18,66.29 ; D5.2 20.75,66.29 ; D5.2 19.94,67.23 ; D5.2 19.13,66.29

## Copper pours and planes (outline as drawn; the poured copper is in the pictures)
3V3 on TOP: 14.99,58.55 17.65,58.55 17.65,62.36 15.88,64.14 11.43,64.14 10.54,63.25 10.54,48.9 13.84,45.59 13.97,45.59 13.97,44.32 13.46,43.81 10.8,43.81 9.91,44.7 9.91,64.77 11.94,66.8 14.99,66.8 18.29,63.5 18.29,60.2 21.34,57.15 21.34,56.13 20.57,55.37 18.42,55.37 17.53,54.48 17.53,52.2 17.27,51.94 15.11,51.94 14.99,52.07
5V on TOP: outline of 257 points within 10.54,6.86 86.49,106.55
GND on TOP: 6.48,109.35 6.48,4.95 110.24,4.95 110.24,109.35 ; 54 cut-outs
GND on BOTTOM: 6.48,109.35 6.48,4.95 110.24,4.95 110.24,109.35 ; 16 cut-outs
N45592 on TOP: 21.59,88.52 24,88.52 27.18,85.34 27.18,76.58 30.99,76.58 37.47,70.1 37.47,67.56 39.24,65.79 39.24,61.72 38.86,61.34 37.72,61.34 37.59,61.47 37.59,64.9 36.07,66.42 32.26,66.42 32.26,68.58 29.72,71.12 25.15,71.12 25.15,78.74 21.34,82.55 21.34,88.27
N45672 on TOP: 35.94,64.9 36.83,64.9 37.21,64.52 37.21,61.47 37.85,60.83 38.99,60.83 42.93,64.77 42.93,67.82 43.56,68.45 46.36,68.45 49.02,71.12 49.02,79.12 49.53,79.63 54.99,79.63 55.37,79.25 55.37,70.36 47.88,62.87 43.18,62.87 40.26,59.94 37.47,59.94 35.69,61.72 35.69,64.64
N46056 on TOP: 81.53,15.62 81.53,14.22 82.68,13.08 108.33,13.08 108.97,13.72 108.97,15.62 108.2,16.38 82.3,16.38
N46086 on TOP: 95.76,22.1 95.76,19.81 97.16,18.42 107.7,18.42 108.08,18.8 108.08,20.83 106.81,22.1
N46098 on TOP: 95.76,9.78 95.76,8 96.27,7.49 107.44,7.49 108.08,8.13 108.08,10.41 107.44,11.05 97.03,11.05
N47294 on TOP: 107.95,66.8 107.95,64.26 107.31,63.63 82.42,63.63 81.79,64.26 81.79,65.91 82.68,66.8
N47328 on TOP: 96.01,72.14 96.01,70.49 97.79,68.71 107.57,68.71 108.08,69.22 108.08,71.12 107.06,72.14
N47344 on TOP: 96.14,59.94 96.14,58.42 96.9,57.66 106.17,57.66 107.95,59.44 107.95,61.47 97.66,61.47
N47364 on TOP: 81.66,82.68 81.66,80.77 82.04,80.39 107.57,80.39 108.08,80.9 108.08,82.8 107.7,83.19 82.17,83.19
N47376 on TOP: 96.14,88.77 96.14,86.87 97.54,85.47 107.57,85.47 107.95,85.85 107.95,87.63 106.68,88.9 96.27,88.9
N47410 on TOP: 95.76,77.22 95.76,75.18 96.65,74.3 106.17,74.3 108.08,76.2 108.08,77.47 107.44,78.11 96.65,78.11
N47434 on TOP: 81.53,99.31 81.53,97.92 82.55,96.9 107.19,96.9 108.08,97.79 108.08,99.19 107.19,100.08 82.3,100.08
N47472 on TOP: 95.76,105.54 95.76,103.63 97.41,101.98 108.08,101.98 108.33,102.24 108.33,103.89 106.68,105.54
N47484 on TOP: 95.89,93.47 95.89,92.08 96.9,91.06 106.55,91.06 107.95,92.46 107.95,94.23 107.44,94.74 97.16,94.74
N47508 on TOP: 81.53,49.4 81.53,48.01 82.55,46.99 107.95,46.99 108.33,47.37 108.33,49.4 107.82,49.91 82.04,49.91
N47520 on TOP: 95.89,55.5 95.89,53.85 97.79,51.94 107.57,51.94 108.08,52.45 108.08,54.23 106.68,55.63 96.01,55.63
N47550 on TOP: 95.63,43.69 95.63,41.78 96.39,41.02 106.81,41.02 107.95,42.16 107.95,44.45 107.82,44.58 96.52,44.58
N47574 on TOP: 107.57,33.27 82.55,33.27 81.79,32.51 81.79,30.86 82.04,30.61 107.44,30.61 107.95,31.12 107.95,32.89
N47604 on TOP: 96.01,38.86 96.01,36.96 97.41,35.56 107.57,35.56 108.08,36.07 108.08,37.85 107.06,38.86
N47616 on TOP: 95.89,25.15 96.52,24.51 106.43,24.51 108.2,26.29 108.2,27.69 107.57,28.32 97.54,28.32 95.89,26.67
N47728 on TOP: 66.8,24.26 66.8,19.05 68.07,17.78 68.07,8.51 67.44,7.87 63.75,7.87 62.99,8.64 62.99,11.43 62.23,12.19 59.82,12.19 59.18,11.56 59.18,8 60.33,6.86 68.58,6.86 69.47,7.75 69.47,24.13 69.34,24.26
N47740 on TOP: 52.07,17.78 52.07,16 54.23,13.84 62.99,13.84 64.39,12.45 64.39,10.16 65.41,9.14 67.18,9.14 67.82,9.78 67.82,12.06 62.1,17.78
N47770 on TOP: 53.47,30.23 54.86,30.23 55.63,29.46 55.63,28.32 51.69,24.38 51.69,14.35 53.59,12.45 57.02,12.45 58.17,11.3 58.17,9.65 57.15,8.64 53.09,8.64 50.67,11.05 50.67,27.43
N72485 on TOP: 71.63,66.8 77.72,66.8 77.98,67.06 77.98,69.22 79.5,69.22 79.5,66.68 77.6,64.77 71.63,64.77
N72769 on TOP: 71.63,50.04 71.63,48.01 71.88,47.75 76.96,47.75 79.5,50.29 79.5,52.71 78.11,52.71 77.98,52.58 77.98,50.67 77.34,50.04
N73065 on TOP: 71.75,34.04 71.75,31.75 76.84,31.75 79.25,34.16 79.25,36.07 78.99,36.32 77.85,36.32 77.72,36.2 77.72,34.16 77.6,34.04
N73365 on TOP: 71.75,16.51 71.75,14.61 71.88,14.48 76.84,14.48 79.38,17.02 79.38,19.05 77.85,19.05 77.72,18.92 77.72,17.02 77.34,16.64 71.88,16.64
N73669 on TOP: 50.29,34.29 50.17,34.29 49.91,34.04 49.91,31.62 49.02,30.73 46.99,30.73 46.86,30.61 46.86,28.58 46.99,28.45 49.15,28.45 52.32,31.62 52.32,33.91 51.82,34.42 50.42,34.42
N74990 on TOP: 48.51,35.05 48.51,37.34 48.26,37.59 46.1,37.59 44.2,35.69 44.2,28.45 44.32,28.32 45.97,28.32 46.23,28.58 46.23,34.42 46.86,35.05
N76545 on TOP: 71.63,61.85 74.17,61.85 76.96,59.06 76.96,57.15 75.44,57.15 75.44,59.06 74.8,59.69 71.63,59.69
N76560 on TOP: 71.5,45.09 74.55,45.09 76.96,42.67 76.96,40.64 76.84,40.51 75.44,40.51 75.44,42.55 75.06,42.93 71.63,42.93 71.5,43.05
N76587 on TOP: 71.75,29.08 74.3,29.08 76.71,26.67 76.71,24 75.44,24 75.18,24.26 75.18,26.03 74.3,26.92 71.75,26.92
N76621 on TOP: 71.63,11.56 74.3,11.56 76.84,9.02 76.84,6.86 75.31,6.86 75.31,8.76 74.68,9.4 72.01,9.4 71.63,9.78
N76655 on TOP: 44.07,20.57 46.1,20.57 46.36,20.32 46.36,15.49 45.97,15.11 44.58,15.11 44.07,15.62
N87792 on TOP: 71.63,69.6 76.58,69.6 76.96,69.22 76.96,67.18 76.84,67.06 72.14,67.06 71.63,67.56
N88579 on TOP: 71.63,52.96 76.71,52.96 76.96,52.71 76.96,50.8 76.84,50.67 71.75,50.67 71.63,50.8
N89000 on TOP: 71.63,36.83 76.07,36.83 76.71,36.2 76.71,34.42 76.58,34.29 72.01,34.29 71.63,34.67
N89401 on TOP: 71.63,19.69 76.33,19.69 76.96,19.05 76.96,17.27 76.71,17.02 72.14,17.02 71.63,17.53
N90793 on TOP: 71.63,83.44 77.6,83.44 77.85,83.69 77.85,85.85 79.25,85.85 79.38,85.73 79.38,83.69 76.96,81.28 71.63,81.28
N91085 on TOP: 71.63,86.23 76.33,86.23 76.84,85.73 76.84,83.82 71.75,83.82 71.63,83.95
N91216 on TOP: 71.63,78.36 74.17,78.36 76.84,75.69 76.84,73.79 76.71,73.66 75.44,73.66 75.31,73.79 75.31,75.82 74.93,76.2 71.63,76.2
N91679 on TOP: 71.63,100.33 71.63,98.55 72.01,98.17 76.58,98.17 79.25,100.84 79.25,102.87 77.72,102.87 77.6,102.74 77.6,100.71 77.22,100.33
N91683 on TOP: 71.63,103.12 76.2,103.12 76.71,102.62 76.71,100.84 76.58,100.71 72.01,100.71 71.63,101.09
N91836 on TOP: 71.63,95.25 74.17,95.25 76.71,92.71 76.71,90.55 75.18,90.55 75.06,90.68 75.06,92.58 74.55,93.09 71.63,93.09
N95463 on TOP: 21.21,87.63 21.21,79.38 23.5,77.09 23.5,73.41 22.61,73.41 22.54,73.47 20.64,73.47 14.73,79.38 14.73,87.38 15.75,88.39 20.45,88.39
N478560 on TOP: 18.92,67.56 24.26,67.56 24.64,67.18 24.64,65.53 24.38,65.28 18.92,65.28 18.67,65.53 18.67,67.31
